# EAGLE board ABS converter (EAGLE 9.6.0)
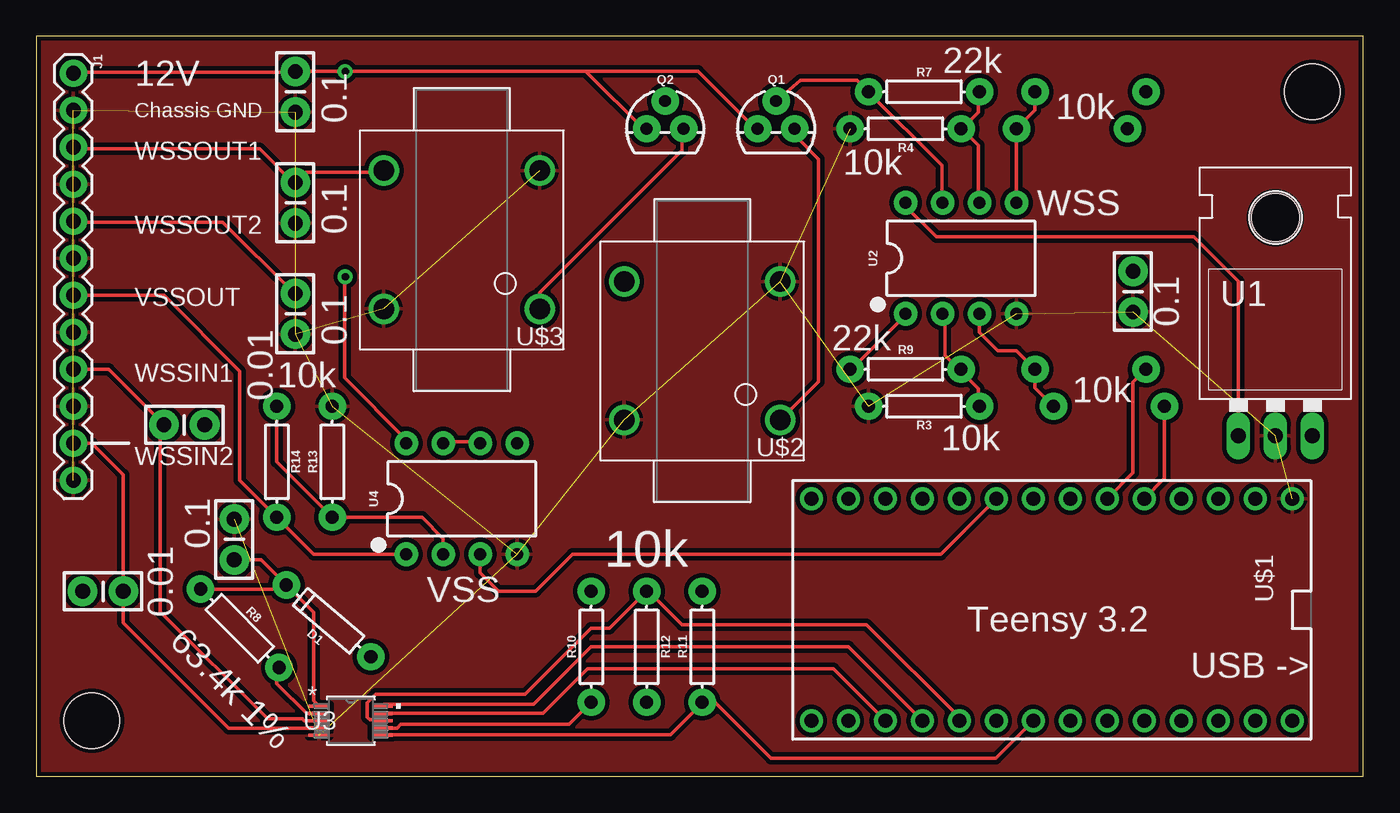
[diagram p0: board, top side]
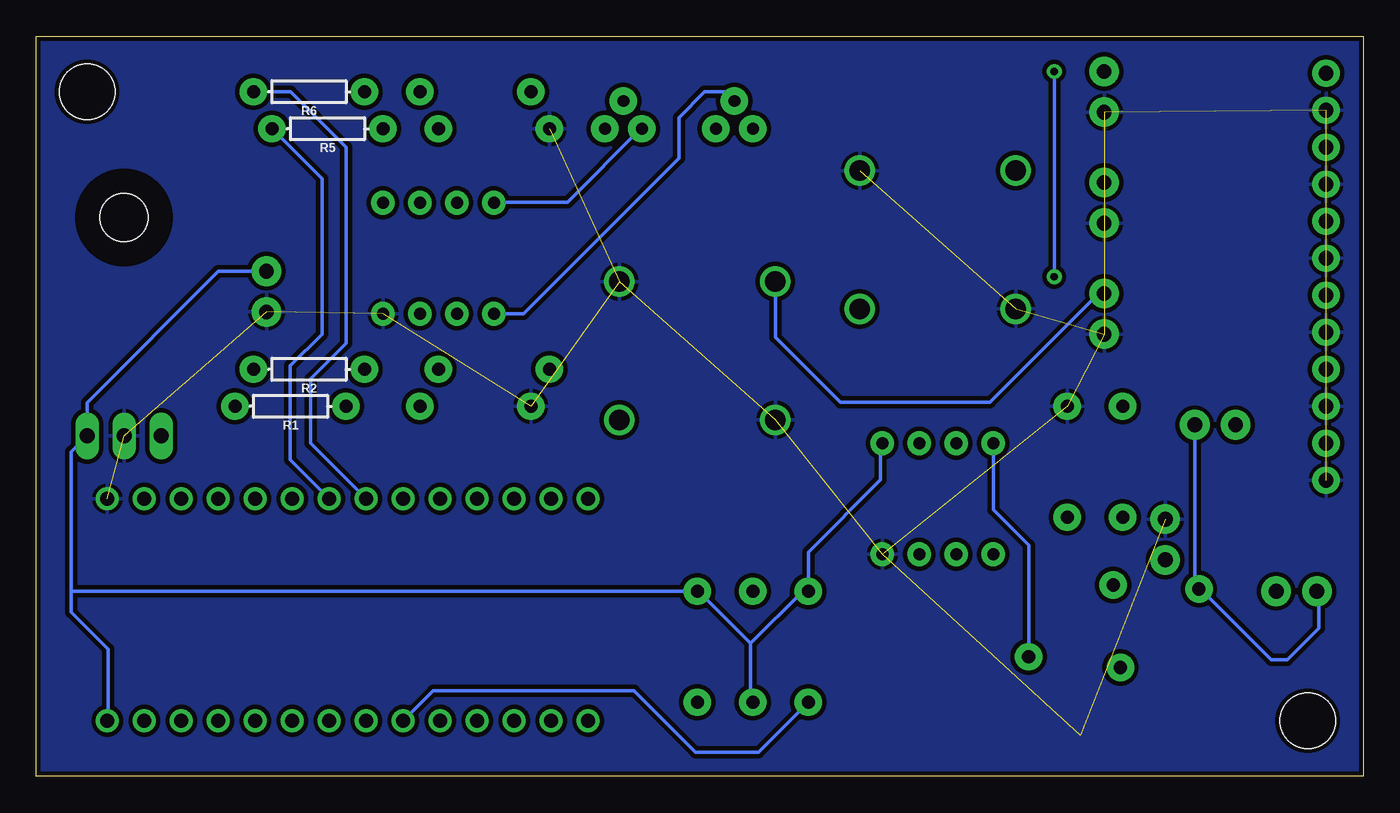
[diagram p1: board, bottom side, seen from below]

Size 91.11 x 50.79 mm. Coordinates in mm from the lower left corner, seen from the top.
Outline: 0,0 91.11,0 91.11,50.79 0,50.79 0,0
Copper layers (1*16): Top 0.035mm / dielectric 1.5mm / Bottom 0.035mm
Design rules "SparkFun": minimum track width 8mil, minimum drill 20mil, track to track 8mil, track to pad 8mil, pad to pad 8mil, via to via 8mil, smd to smd 8mil, copper to edge 8mil, drill to drill 8mil, minimum pad ring 12mil, minimum via ring 10mil, stop-mask expansion 4mil, vias tented up to drill 20mil, thermal gap 10mil
Net classes: 0 default: width 0.254 mm, drill 0.508 mm, clearance 0.127 mm
Holes 3.81 mm at 87.63,46.99 3.81,3.81

## Footprints (pad centres in the part's own frame; a part is rotated, then mirrored left to right if it is on the bottom)
CAP-PTH-SMALL-KIT = drill 1.016 pad 2.032: 1 -1.397,0; 2 1.397,0
DIODE-1N4148 = drill 0.9 pad 1.88: A -3.81,0; C 3.81,0
1X12 = drill 1.016 pad 1.88: 1 0,0; 2 2.54,0; 3 5.08,0; 4 7.62,0; 5 10.16,0; 6 12.7,0; 7 15.24,0; 8 17.78,0; 9 20.32,0; 10 22.86,0; 11 25.4,0; 12 27.94,0
TO-92 = drill 0.813 pad 1.88: 1 -1.27,0; 2 0,1.905; 3 1.27,0
AXIAL-0.3 = drill 0.9 pad 1.88: P$1 -3.81,0; P$2 3.81,0
TO-220-ALT = drill 1.016 long: GND 0,-3.81; IN -2.54,-3.81; OUT 2.54,-3.81 | hole 3.302: 0,11.176
DIP08 = drill 0.813 pad 1.626: 1 -3.81,-3.81; 2 -1.27,-3.81; 3 1.27,-3.81; 4 3.81,-3.81; 5 3.81,3.81; 6 1.27,3.81; 7 -1.27,3.81; 8 -3.81,3.81
21-0061L = smd 1.422 x 0.229: 1 -2.172,1; 2 -2.172,0.5; 3 -2.172,0; 4 -2.172,-0.5; 5 -2.172,-1; 6 2.172,-1; 7 2.172,-0.5; 8 2.172,0; 9 2.172,0.5; 10 2.172,1
TEENSY_3.0-3.2&LC_DIL = drill 0.965: 0 -7.62,13.97; 1 -7.62,11.43; 2 -7.62,8.89; 3 -7.62,6.35; 3.3V 7.62,11.43; 4 -7.62,3.81; 5 -7.62,1.27; 6 -7.62,-1.27; 7 -7.62,-3.81; 8 -7.62,-6.35; 9 -7.62,-8.89; 10 -7.62,-11.43; 11 -7.62,-13.97; 12 -7.62,-16.51; 13 7.62,-16.51; 14/A0 7.62,-13.97; 15/A1 7.62,-11.43; 16/A2 7.62,-8.89; 17/A3 7.62,-6.35; 18/A4 7.62,-3.81; 19/A5 7.62,-1.27; 20/A6 7.62,1.27; 21/A7 7.62,3.81; 22/A8 7.62,6.35; 23/A9 7.62,8.89; AGND 7.62,13.97; GND -7.62,16.51; VIN 7.62,16.51
TRANSFORMER = drill 1.4: 1 -5.35,4.75; 2 -5.35,-4.75; 3 5.35,-4.75; 4 5.35,4.75

## Placement (x,y rotation side)
C1  0.1uF  [CAP-PTH-SMALL-KIT]  17.78,39.37 270 top
C2  0.1uF  [CAP-PTH-SMALL-KIT]  17.78,46.99 90 top
C3  0.1uF  [CAP-PTH-SMALL-KIT]  75.31,33.27 270 top
C4  0.1uF  [CAP-PTH-SMALL-KIT]  17.78,31.75 270 top
C5  0.01uF  [CAP-PTH-SMALL-KIT]  10.16,24.13 0 top
C6  0.01uF  [CAP-PTH-SMALL-KIT]  4.57,12.7 180 top
C7  0.1uF  [CAP-PTH-SMALL-KIT]  13.59,16.26 90 top
D1  200mA/100V/1V  [DIODE-1N4148]  20.07,10.67 139.7 top
J1  [1X12]  2.54,48.26 270 top
Q1  600mA/40V  [TO-92]  50.8,44.45 0 top
Q2  600mA/40V  [TO-92]  43.18,44.45 0 top
R1  10k  [AXIAL-0.3]  73.66,25.4 180 bottom
R2  10k  [AXIAL-0.3]  72.39,27.94 180 bottom
R3  10k  [AXIAL-0.3]  60.96,25.4 180 top
R4  10k  [AXIAL-0.3]  59.69,44.45 180 top
R5  10k  [AXIAL-0.3]  71.12,44.45 180 bottom
R6  10k  [AXIAL-0.3]  72.39,46.99 180 bottom
R7  20k  [AXIAL-0.3]  60.96,46.99 0 top
R8  63.4k  [AXIAL-0.3]  13.97,10.16 315 top
R9  20k  [AXIAL-0.3]  59.69,27.94 0 top
R10  10k  [AXIAL-0.3]  38.1,8.89 90 top
R11  10k  [AXIAL-0.3]  45.72,8.89 90 top
R12  10k  [AXIAL-0.3]  41.91,8.89 270 top
R13  10k  [AXIAL-0.3]  20.32,21.59 90 top
R14  10k  [AXIAL-0.3]  16.51,21.59 270 top
U1  [TO-220-ALT]  85.09,27.18 0 top
U2  LM358  [DIP08]  63.5,35.56 0 top
U3  MAX9921AUB+  [21-0061L]  21.59,3.81 0 top
U4  LM358  [DIP08]  29.21,19.05 0 top
U$1  TEENSY_3.1-3.2_DIL  [TEENSY_3.0-3.2&LC_DIL]  69.72,11.43 270 top
U$2  TRANSFORMERPTH  [TRANSFORMER]  45.72,29.21 180 top
U$3  TRANSFORMERPTH  [TRANSFORMER]  29.21,36.83 180 top

## Library data of the parts
C1-C7 = SparkFun-Capacitors; PROD_ID: CAP-08370
D1 = SparkFun-DiscreteSemi; PROD_ID: DIO-08378
J1 = SparkFun-Connectors
Q1 Q2 = SparkFun-DiscreteSemi; PROD_ID: TRANS-09536
R1-R6 R10-R14 = SparkFun-Resistors; PROD_ID: RES-12183
R7-R9 = SparkFun-Resistors
U1 = SparkFun-IC-Power; PROD_ID: VREG-08450; SF_ID: COM-00107
U2 U4 = SparkFun-IC-Amplifiers; PROD_ID: IC-09172
U3 = Maxim integrated; MANUFACTURER_PART_NUMBER: MAX9921AUB+; VENDOR: Maxim Integrated Products
U$1 = Teensy_3_and_LC_Series_Boards_v1.4
U$2 U$3 = SparkFun-Coils

## Nets
3.3V: U$1.3.3V
5V: C3.1 R10.P$2 R11.P$2 R12.P$2 U1.OUT U4.5 U$1.VIN
12V: C2.2 D1.A J1.1 Q1.1 Q2.1 U1.IN U2.8 U4.8
AGND: U$1.AGND
DIAG9921: U3.10 U$1.16/A2
ERR9921: R12.P$1 U3.8 U$1.17/A3
GND: C1.2 C2.1 C3.2 C4.2 C7.2 J1.2 J1.4 J1.6 J1.8 J1.10 J1.12 R3.P$2 R4.P$2 R13.P$2 U1.GND U2.4 U3.5 U4.4 U$1.GND U$2.2 U$2.4 U$3.2 U$3.4
N$3: Q2.2 R9.P$1 U2.1
N$4: R1.P$1 R2.P$1 U2.3
N$5: R3.P$1 R9.P$2 U2.2
N$6: Q2.3 U$3.1
N$9: R5.P$1 R6.P$1 U2.5
N$10: R4.P$1 R7.P$2 U2.6
N$11: Q1.2 R7.P$1 U2.7
N$12: Q1.3 U$2.1
N$13: R8.P$2 U3.2
N$14: C5.2 C6.2 C7.1 D1.C R8.P$1 U3.1
N$15: U4.6 U4.7
N$17: R13.P$1 R14.P$1 U4.2
OE9921: U3.9 U$1.15/A1
OUT19921: R10.P$1 U3.7 U$1.18/A4
OUT29921: R11.P$1 U3.6 U$1.19/A5
VSSOUT: J1.7 R14.P$2 U4.1
VSSPIN: U4.3 U$1.7
WSS1PIN1: R1.P$2 U$1.3
WSS1PIN2: R2.P$2 U$1.4
WSS2PIN1: R5.P$2 U$1.5
WSS2PIN2: R6.P$2 U$1.6
WSSIN1: C5.1 J1.9 U3.3
WSSIN2: C6.1 J1.11 U3.4
WSSOUT1: C1.1 J1.3 U$3.3
WSSOUT2: C4.1 J1.5 U$2.3

## Tracks (layer width: path | path; a pad name or v marks a point on that pad's centre or on a via)
5V
  Bottom 0.254: 42.06,9.12 42.06,5.13 R12.P$2 | 42.06,9.12 45.64,12.7 R11.P$2 88.72,12.7 | U4.5 33.15,22.73 33.15,20.34 38.1,15.39 R10.P$2 38.48,12.7 42.06,9.12 | 88.72,12.7 88.72,11.25 86.18,8.71 86.18,3.83 U$1.VIN | 88.72,12.7 88.72,22.28 U1.OUT 87.63,25.65 78.61,34.67 C3.1
12V  (via drill 0.51)
  Top 0.254: J1.1 2.74,48.34 17.6,48.34 C2.2 v21.21,48.39 37.85,48.39 | U1.IN 82.55,33.98 79.5,37.03 61.8,37.03 59.69,39.14 U2.8 | Q1.1 49.38,44.45 45.44,48.39 37.85,48.39 | U4.8 25.4,23.11 21.16,27.36 21.16,34.24 v21.21,34.29 | Q2.1 41.83,44.45 41.76,44.37 37.8,48.34 37.85,48.39
  Bottom 0.254: U4.8 25.38,22.73 25.38,18.29 22.96,15.88 22.96,8.23 D1.A | U2.8 59.66,39.42 54.63,39.42 49.61,44.45 Q1.1 | v21.21,48.39 v21.21,34.29
DIAG9921
  Top 0.254: U3.10 23.89,4.94 34.15,4.94 38.1,8.89 55.75,8.89 U$1.16/A2
ERR9921
  Top 0.254: U3.8 23.13,3.81 23.07,3.87 22.91,3.87 22.72,4.06 22.72,5.06 23.3,5.64 33.58,5.64 38.1,10.16 39.37,10.16 R12.P$1 42.06,12.68 44.32,10.41 57,10.41 63.37,4.04 U$1.17/A3
GND  (22 unrouted)
  pour Top (isolate 0.305): 0,50.8 0,0 91.44,0 91.44,50.8
  pour Bottom (isolate 0.305): 0,50.8 0,0 91.44,0 91.44,50.8
N$3
  Top 0.254: U2.1 59.66,31.65 56.01,27.99 R9.P$1
  Bottom 0.254: U2.1 57.66,31.75 46.99,42.42 46.99,45.21 45.21,46.99 43.81,46.99 Q2.2
N$4
  Top 0.254: R1.P$1 68.58,26.67 R2.P$1 67.31,29.21 66.04,29.21 64.77,30.48 U2.3
N$5
  Top 0.254: U2.2 62.41,31.65 62.41,28.91 63.32,27.99 R9.P$2 63.55,27.76 64.69,26.62 64.69,25.48 R3.P$1
N$6
  Top 0.254: U$3.1 34.56,33.19 44.35,42.98 44.35,44.45 Q2.3
N$9
  Top 0.254: R6.P$1 68.58,45.72 R5.P$1 U2.5
N$10
  Top 0.254: 63.55,44.45 64.69,43.31 64.69,39.42 U2.6 | 63.55,44.45 64.69,45.59 64.69,46.97 R7.P$2 | 63.55,44.45 R4.P$1
N$11
  Top 0.254: U2.7 62.18,39.42 62.18,41.94 57.15,46.97 R7.P$1 56.36,47.78 52.46,47.78 Q1.2
N$12
  Top 0.254: Q1.3 52.12,44.45 52.12,43.97 53.72,42.37 53.72,27.08 51.21,24.56 U$2.1
N$13
  Top 0.254: U3.2 18.55,4.31 16.51,6.35 16.51,7.31 R8.P$2
N$14
  Top 0.254: R8.P$1 16.23,12.85 D1.C | U3.1 19.05,5.18 19.05,11.24 17.69,12.61 D1.C | C7.1 15.43,14.86 D1.C
  Bottom 0.254: C5.2 11.56,13.13 R8.P$1 11.15,12.85 6.3,8 5.21,8 3.05,10.16 3.05,12.57 C6.2
N$15
  Top 0.254: U4.7 28.12,22.96 30.4,22.96 U4.6
N$17
  Top 0.254: R14.P$1 16.51,21.59 R13.P$1 26.48,17.78 27.94,16.32 U4.2
OE9921
  Top 0.254: U$1.15/A1 54.74,7.37 37.85,7.37 34.79,4.31 U3.9
OUT19921
  Top 0.254: R10.P$1 36.58,3.56 25.02,3.56 24.77,3.31 U3.7
  Bottom 0.254: U$1.18/A4 63.86,5.87 50.06,5.87 45.85,1.65 41.53,1.65 R10.P$1
OUT29921
  Top 0.254: U3.6 23.77,2.85 43.56,2.85 45.72,5 R11.P$1 46.61,5.08 50.44,1.25 65.89,1.25 U$1.19/A5
VSSOUT
  Top 0.254: J1.7 8.76,33.02 13.97,27.81 13.97,20.32 R14.P$2 19.05,15.24 U4.1
VSSPIN
  Top 0.254: U4.3 30.48,13.97 31.75,12.7 34.29,12.7 36.83,15.24 62.1,15.24 U$1.7
WSS1PIN1
  Top 0.254: R1.P$2 77.47,20.45 U$1.3
WSS1PIN2
  Top 0.254: R2.P$2 75.31,27.05 75.31,20.83 U$1.4
WSS2PIN1
  Bottom 0.254: R5.P$2 71.5,41.02 71.5,30.35 73.69,28.17 73.69,21.74 U$1.5
WSS2PIN2
  Bottom 0.254: R6.P$2 73.66,46.99 69.85,43.18 69.85,29.72 72.26,27.3 72.26,22.86 U$1.6
WSSIN1
  Top 0.254: U3.3 18.4,3.81 18.28,3.94 15.88,3.94 8.51,11.3 8.51,23.88 C5.1 4.95,27.94 J1.9
WSSIN2
  Top 0.254: U3.4 13.2,3.31 5.97,10.54 C6.1 5.97,20.7 3.81,22.86 J1.11
WSSOUT1
  Top 0.254: J1.3 2.74,43.08 15.32,43.08 17.6,40.79 C1.1 17.83,40.79 18.52,41.48 23.77,41.48 U$3.3
WSSOUT2
  Top 0.254: J1.5 2.74,38.05 12.8,38.05 17.6,33.25 C4.1
  Bottom 0.254: U$2.3 40.37,30.15 35.9,25.68 25.63,25.68 18.16,33.15 C4.1

## Text on the board
tPlace: 22k | 12V | Chassis GND | 0.1 | 10k | WSSOUT1 | 10k | WSS | WSSOUT2 | 0.1 | VSSOUT | 0.1 | 0.1 | 22k | WSSIN1 | 10k | 0.01 | 10k | 10k | WSSIN2 | 0.1 | 10k | VSS | 0.01 | Teensy 3.2 | 63.4k 1% | USB ->